# EAGLE board Hexagonal_MCU (EAGLE 8.7.1)
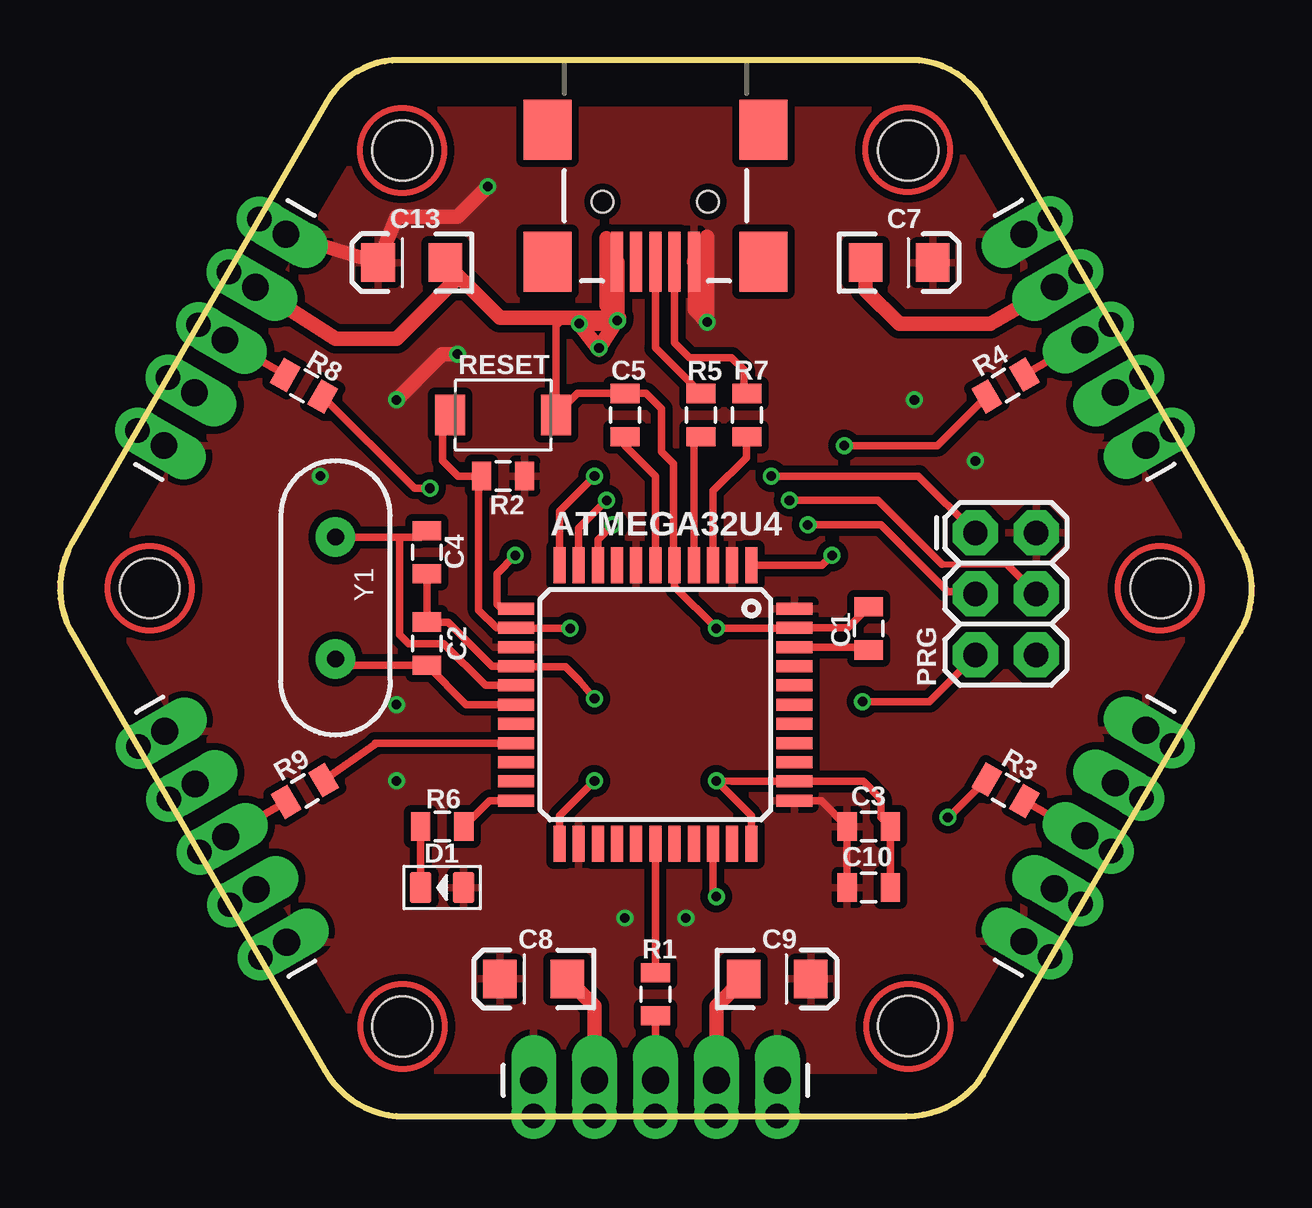
[diagram p0: board, top side]
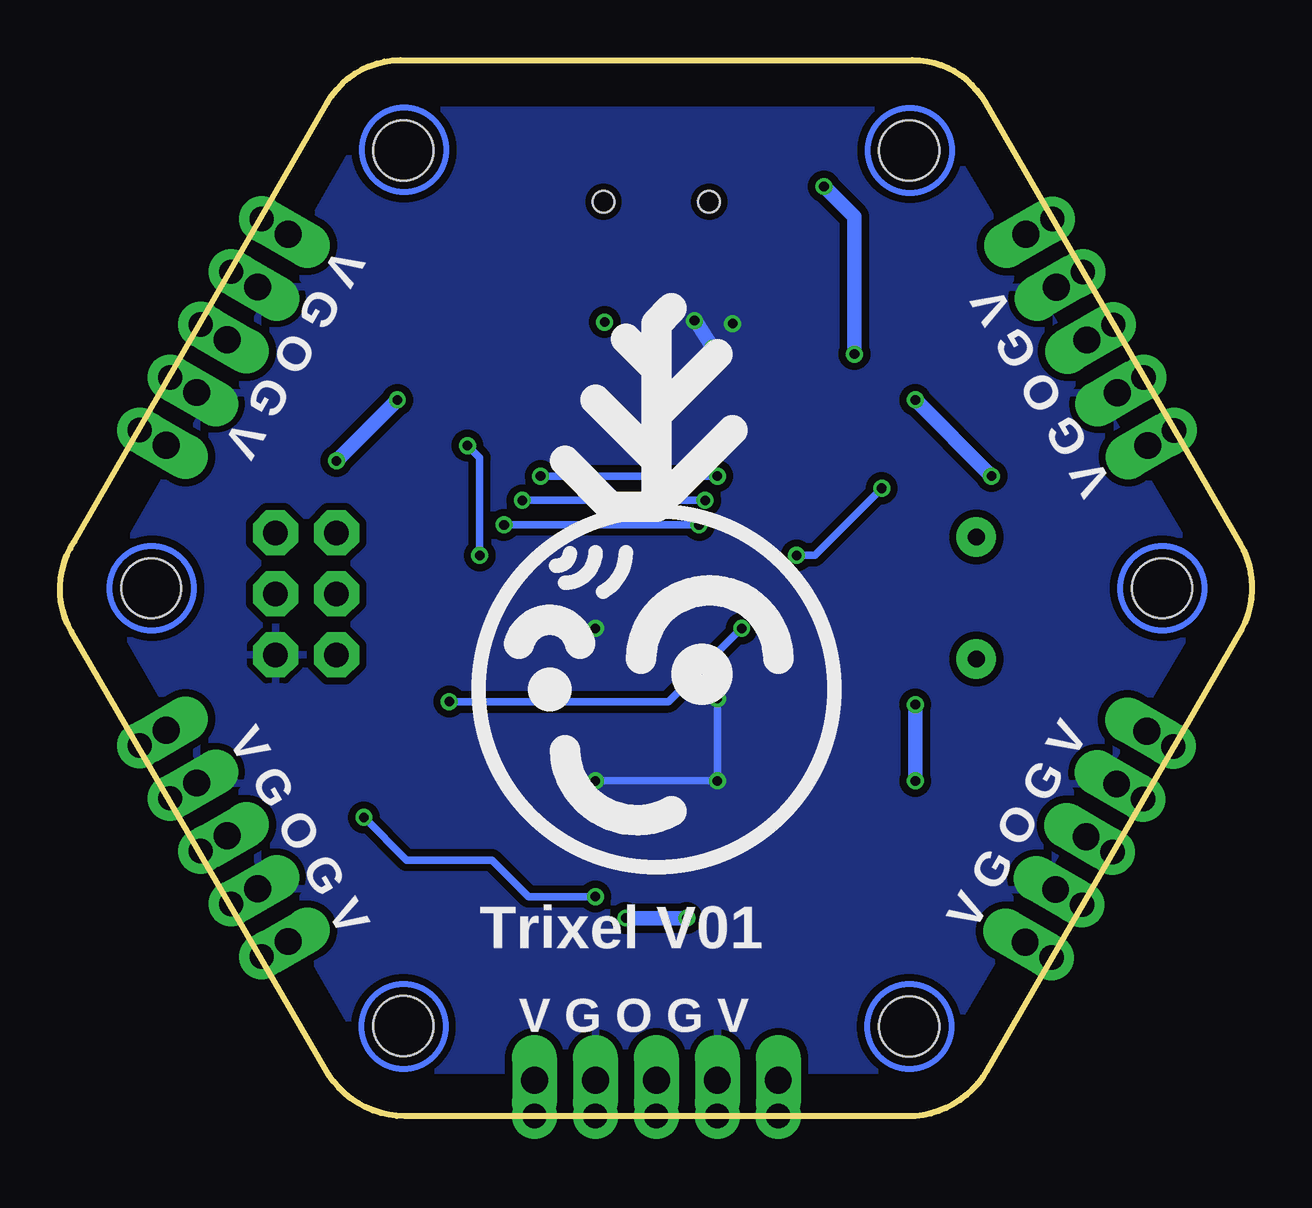
[diagram p1: board, bottom side, seen from below]

Size 49.68 x 44.01 mm. Coordinates in mm from the lower left corner, seen from the top.
Outline: 14.02,0 35.3,0 arc57 38.47,1.71 49.2,20.19 arc64 49.08,23.94 38.54,42.23 arc60 35.49,44.01 14.15,44.01 arc61 11.1,42.23 0.5,23.88 arc58 0.44,20.26 11.04,1.91 arc55 14.02,0
Copper layers (1*16): Top 0.035mm / dielectric 1.5mm / Bottom 0.035mm
Design rules "SeeedStudio_2layer_DRU_no_angle_20140221 *": minimum track width 6mil, minimum drill 12mil, track to track 6mil, track to pad 6mil, pad to pad 6mil, via to via 6mil, smd to smd 0mil, copper to edge 10mil, drill to drill 10mil, minimum pad ring 10mil, minimum via ring 6mil, stop-mask expansion 2mil, vias tented up to drill 20mil, thermal gap 10mil
Net classes: 0 default: width 0.203 mm
Holes 2.5 mm at 35.36,3.76 14.28,3.73 45.88,22 35.36,40.23 14.28,40.23 3.74,22
tRestrict: area 8.6,9.6 to 8.8,9.7

## Footprints (pad centres in the part's own frame; a part is rotated, then mirrored left to right if it is on the bottom)
TQFP44 = smd 1.5 x 0.5: 1 -5.8,4; 2 -5.8,3.2; 3 -5.8,2.4; 4 -5.8,1.6; 5 -5.8,0.8; 6 -5.8,0; 7 -5.8,-0.8; 8 -5.8,-1.6; 9 -5.8,-2.4; 10 -5.8,-3.2; 11 -5.8,-4; 23 5.8,-4; 24 5.8,-3.2; 25 5.8,-2.4; 26 5.8,-1.6; 27 5.8,-0.8; 28 5.8,0; 29 5.8,0.8; 30 5.8,1.6; 31 5.8,2.4; 32 5.8,3.2; 33 5.8,4 | smd 0.5 x 1.5: 12 -4,-5.8; 13 -3.2,-5.8; 14 -2.4,-5.8; 15 -1.6,-5.8; 16 -0.8,-5.8; 17 0,-5.8; 18 0.8,-5.8; 19 1.6,-5.8; 20 2.4,-5.8; 21 3.2,-5.8; 22 4,-5.8; 34 4,5.8; 35 3.2,5.8; 36 2.4,5.8; 37 1.6,5.8; 38 0.8,5.8; 39 0,5.8; 40 -0.8,5.8; 41 -1.6,5.8; 42 -2.4,5.8; 43 -3.2,5.8; 44 -4,5.8
0805 = smd 0.8 x 1.2: 1 -0.9,0; 2 0.9,0
EIA3216 = smd 1.4 x 1.6: A 1.4,0; C -1.4,0
LED-0805 = smd 0.889 x 1.27: + -0.889,0; - 0.889,0
1X05_NO_SILK = drill 1.016 pad 1.88: 1 0,0; 2 2.54,0; 3 5.08,0; 4 7.62,0; 5 10.16,0
USB-MINIB = smd 2.5 x 0.5: D+ 2.5,0; D- 2.5,0.8; GND 2.5,-1.6; ID 2.5,-0.8; VBUS 2.5,1.6 | smd 2.5 x 2: MTN1 -3,4.5; MTN2 2.5,4.5; MTN3 -3,-4.5; MTN4 2.5,-4.5 | hole 0.9: 0,2.2; 0,-2.2
1X05_LONGPADS = drill 1.118 pad 1.88 long: 1 0,0; 2 2.54,0; 3 5.08,0; 4 7.62,0; 5 10.16,0
2X3 = drill 1.016 pad 1.88 octagon: 1 0,0; 2 0,2.54; 3 2.54,0; 4 2.54,2.54; 5 5.08,0; 6 5.08,2.54
SW2-4.0X3.0X2.0 = smd 1.25 x 1.7: 1 -2.2,0; 2 2.2,0
HC49US = drill 0.7 pad 1.651: 1 -2.54,0; 2 2.54,0

## Placement (x,y rotation side)
ATMEGA32U4  ATMEGA32U4TQFP-44  [TQFP44]  24.82,17.14 270 top
C1  0.1uF  [0805]  33.71,20.32 270 top
C2  22pF  [0805]  15.29,19.68 90 top
C3  0.1uF  [0805]  33.71,12.06 180 top
C4  22pF  [0805]  15.29,23.5 270 top
C5  1uF  [0805]  23.55,29.21 270 top
C7  10uF  [EIA3216]  34.98,35.56 0 top
C8  10uF  [EIA3216]  19.74,5.71 180 top
C9  10uF  [EIA3216]  29.9,5.71 0 top
C10  1uF  [0805]  33.71,9.53 0 top
C13  10uF  [EIA3216]  14.66,35.56 180 top
D1  GREEN-0805  [LED-0805]  15.93,9.53 180 top
J1  [1X05_NO_SILK]  29.9,0 180 top
J2  [1X05_NO_SILK]  41.27,6.64 60 top
J3  USB-MINIB-5PIN  [USB-MINIB]  24.82,38.1 270 top
J4  [1X05_LONGPADS]  29.9,1.5 180 top
J5  [1X05_LONGPADS]  40.17,7.28 60 top
J6  [1X05_NO_SILK]  46.35,28.58 120 top
J7  [1X05_LONGPADS]  45.25,27.95 120 top
J8  [1X05_NO_SILK]  8.31,37.37 240 top
J9  [1X05_LONGPADS]  9.41,36.74 240 top
J10  [1X05_NO_SILK]  3.27,15.41 300 top
J11  [1X05_LONGPADS]  4.37,16.04 300 top
PRG  AVR_SPI_PRG_6PTH  [2X3]  38.15,24.3 270 top
R1  1k  [0805]  24.82,5.08 270 top
R2  10K  [0805]  18.47,26.67 0 top
R3  1k  [0805]  39.41,13.58 330 top
R4  1k  [0805]  39.41,30.44 30 top
R5  22  [0805]  26.72,29.21 90 top
R6  1k  [0805]  15.93,12.06 180 top
R7  22  [0805]  28.63,29.21 90 top
R8  1k  [0805]  10.17,30.43 150 top
R9  1k  [0805]  10.21,13.55 210 top
RESET  B3U-1000P-2P-SMD  [SW2-4.0X3.0X2.0]  18.47,29.21 180 top
Y1  16MHz  [HC49US]  11.48,21.59 270 top

## Library data of the parts
ATMEGA32U4 = SparkFun-DigitalIC
C1-C5 C7-C10 C13 R1-R9 Y1 = SparkFun
D1 = Seeed-LED-2016; MPN: 17-215SYGC/S530-E2/TR8
J1 J2 J4-J11 PRG = SparkFun-Connectors
J3 = SparkFun-Connectors; PROD_ID: CONN-08193
RESET = SMD_Button_Custom; MPN: B3U-1000P-2P-SMD

## Nets
5V [vcc]: ATMEGA32U4.2 ATMEGA32U4.7 ATMEGA32U4.14 ATMEGA32U4.24 ATMEGA32U4.34 ATMEGA32U4.44 C3.2 C7.A C8.A C9.A C10.1 C13.A D1.+ J1.1 J1.5 J2.1 J2.5 J3.VBUS J4.1 J4.5 J5.1 J5.5 J6.1 J6.5 J7.1 J7.5 J8.1 J8.5 J9.1 J9.5 J10.1 J10.5 J11.1 J11.5 PRG.2 R2.2
A0: ATMEGA32U4.36
A1: ATMEGA32U4.37
A2: ATMEGA32U4.38
A3: ATMEGA32U4.39
A4: ATMEGA32U4.40
A5: ATMEGA32U4.41
AREF: ATMEGA32U4.42 C1.2
D2_SDA: ATMEGA32U4.19 R9.1
D3_SCL: ATMEGA32U4.18
D4: ATMEGA32U4.25
D5: ATMEGA32U4.31 R3.1
D6: ATMEGA32U4.27
D7: ATMEGA32U4.1 R4.1
D8: ATMEGA32U4.28 R1.1
D9: ATMEGA32U4.29
D10: ATMEGA32U4.30
D11: ATMEGA32U4.12 R8.1
D12: ATMEGA32U4.26
D13: ATMEGA32U4.32
D14: ATMEGA32U4.8
D+: ATMEGA32U4.4 R5.1
D-: ATMEGA32U4.3 R7.1
GND: ATMEGA32U4.5 ATMEGA32U4.15 ATMEGA32U4.23 ATMEGA32U4.33 ATMEGA32U4.35 ATMEGA32U4.43 C1.1 C2.2 C3.1 C4.2 C5.1 C7.C C8.C C9.C C10.2 C13.C J1.2 J1.4 J2.2 J2.4 J3.GND J4.2 J4.4 J5.2 J5.4 J6.2 J6.4 J7.2 J7.4 J8.2 J8.4 J9.2 J9.4 J10.2 J10.4 J11.2 J11.4 PRG.6 RESET.1
MISO: ATMEGA32U4.11 PRG.1
MOSI: ATMEGA32U4.10 PRG.4
N$1: ATMEGA32U4.16 C4.1 Y1.1
N$2: ATMEGA32U4.17 C2.1 Y1.2
N$4: J2.3 J5.3 R3.2
N$5: J1.3 J4.3 R1.2
N$6: J3.D- R7.2
N$7: D1.- R6.2
N$8: J3.D+ R5.2
N$9: J6.3 J7.3 R4.2
N$10: J8.3 J9.3 R8.2
N$11: J10.3 J11.3 R9.2
RESET: ATMEGA32U4.13 PRG.5 R2.1 RESET.2
RXI: ATMEGA32U4.20
SCK: ATMEGA32U4.9 PRG.3
TXLED: ATMEGA32U4.22 R6.1
TXO: ATMEGA32U4.21
UCAP: ATMEGA32U4.6 C5.2

## Tracks (layer width: path | path; a pad name or v marks a point on that pad's centre or on a via)
5V  (via drill 0.4)
  Top 0.305: ATMEGA32U4.34 31.73,13.14 C3.2 C10.1 | J1.5 J4.5 | J1.1 J4.1 | J2.1 J5.1 | J2.5 J5.5 | J7.1 J6.1 | J6.5 J7.5 | J8.1 J9.1 | J9.5 J8.5 | J11.1 J10.1 | J11.5 J10.5
  Top 0.61: J3.VBUS 26.47,35.55 26.47,33.59 v26.98,33.08 26.98,36.64 | J9.1 C13.A 14.02,37.47 16.56,37.47 v17.83,38.73 | v14.02,29.84 15.93,31.75 v16.56,31.75
  Bottom 0.61: v23.55,8.26 v26.09,8.26 | v14.02,13.97 v14.02,17.14 | v10.85,26.67 v14.02,29.84 | v35.61,29.84 v38.15,27.3 | v16.56,31.75 16.56,37.47 v17.83,38.73
  pour Top (isolate 0.305): 14.66,1.91 34.98,1.91 37.52,3.81 47.04,20.32 47.04,23.5 36.88,41.27 34.98,41.91 14.02,41.91 12.75,40.64 2.59,23.5 2.59,20.32 12.75,3.17
AREF
  Top 0.305: ATMEGA32U4.42 33.58,19.55 C1.2
D2_SDA
  Top 0.305: ATMEGA32U4.19 13.14,15.54 13.14,15.49 R9.1
D5  (via drill 0.4)
  Top 0.305: ATMEGA32U4.31 27.22,9.28 v27.36,9.14 | v37.01,12.45 37.05,12.45 R3.1
  Bottom 0.305: v27.36,9.14 30.15,9.14 31.68,10.67 35.23,10.67 v37.01,12.45
D7  (via drill 0.4)
  Top 0.305: ATMEGA32U4.1 31.76,22.95 v32.19,23.37 | v32.69,27.94 36.58,27.94 R4.1
  Bottom 0.305: v32.19,23.37 32.19,27.43 v32.69,27.94
D8
  Top 0.305: R1.1 ATMEGA32U4.28
D11  (via drill 0.4)
  Top 0.305: ATMEGA32U4.12 18.41,21.14 18.22,21.34 18.22,22.61 v18.98,23.37 | v15.42,26.16 14.78,26.16 R8.1
  Bottom 0.305: v18.98,23.37 18.22,23.37 v15.42,26.16
D+
  Top 0.305: ATMEGA32U4.4 26.42,28 R5.1
D-
  Top 0.305: ATMEGA32U4.3 27.22,26.05 28.6,27.43 28.6,28.29 R7.1
GND  (via drill 0.4)
  Top 0.305: C4.2 C2.2 16.18,20.57 18.01,18.75 ATMEGA32U4.15 19.03,18.73 21.07,18.73 21.64,18.16 v22.28,17.4 | C1.1 32.83,20.34 ATMEGA32U4.43 30.59,20.32 v27.36,20.32 25.62,22.06 ATMEGA32U4.5 25.58,22.98 25.58,27.18 25.07,27.69 25.07,29.46 24.43,30.11 C5.1 21.57,30.11 RESET.1 20.67,32.93 21.01,33.27 | C10.2 C3.1 34.22,12.46 34.22,13.21 33.48,13.95 ATMEGA32U4.35 28.02,13.95 v27.36,13.97 28.82,12.51 ATMEGA32U4.33 | ATMEGA32U4.23 20.82,12.51 v22.28,13.97 | J1.4 J4.4 | J1.2 J4.2 | J2.2 J5.2 | J2.4 J5.4 | J6.2 J7.2 | J6.4 J7.4 | J8.2 8.31,34.29 J9.2 | J9.4 J8.4 | J10.2 J11.2 | J11.4 J10.4
  Top 0.61: 23.23,33.21 23.23,35.59 J3.GND 22.79,36.03 | 23.23,33.21 v23.23,33.15 | 22.79,36.03 22.79,36.58 | 22.79,36.03 22.79,33.78 23.3,33.27 21.01,33.27 18.35,33.27 C13.C | J4.2 27.36,4.58 C9.C | J4.4 22.28,4.58 C8.C | C7.C 33.58,34.42 34.98,33.02 38.79,33.02 J7.4 | J9.2 11.48,32.38 14.02,32.38 16.56,34.92 15.93,35.56 | v22.47,32 22.47,31.94 v21.64,33.02 | 23.23,33.21 v22.47,32 | v22.47,32 v21.64,33.02 | v21.64,33.02 22.91,33.02
  Bottom 0.305: v27.36,13.97 v22.28,13.97 v22.28,17.4
  Bottom 0.61: v23.23,33.15 23.11,33.02 v22.47,32
  pour Bottom (isolate 0.305): 14.66,1.91 34.98,1.91 37.52,3.81 47.04,20.32 47.04,23.5 36.88,41.27 34.98,41.91 14.02,41.91 12.75,40.64 2.59,23.5 2.59,20.32 12.75,3.17
MISO  (via drill 0.4)
  Top 0.305: ATMEGA32U4.11 20.82,25.21 v22.28,26.67 | v29.65,26.67 35.78,26.67 PRG.1
  Bottom 0.305: v22.28,26.67 v29.65,26.67
MOSI  (via drill 0.4)
  Top 0.254: 36.76,22.99 39.47,22.99
  Top 0.305: ATMEGA32U4.10 21.62,24.49 v22.79,25.65 | v30.41,25.65 34.09,25.65 36.76,22.99 | 39.47,22.99 PRG.4
  Bottom 0.305: v22.79,25.65 v30.41,25.65
N$1
  Top 0.305: Y1.1 14.15,24.13 | 14.15,24.13 15.03,24.13 C4.1 | ATMEGA32U4.16 17.73,17.95 15.99,19.68 14.53,19.68 14.15,20.07 14.15,24.13
N$2
  Top 0.305: Y1.2 11.75,18.79 C2.1 16.93,17.14 ATMEGA32U4.17
N$4
  Top 0.305: R3.2 J5.3 J2.3
N$5
  Top 0.305: R1.2 J4.3 J1.3
N$6
  Top 0.305: J3.D- 25.62,32.22 26.24,31.6 27.99,31.6 28.5,31.09 28.5,30.24 R7.2
N$7
  Top 0.305: R6.2 D1.-
N$8
  Top 0.305: J3.D+ 24.82,32.02 R5.2
N$9
  Top 0.305: R4.2 J7.3 J6.3
N$10
  Top 0.305: R8.2 J9.3 J8.3
N$11
  Top 0.305: R9.2 J11.3 J10.3
RESET  (via drill 0.4)
  Top 0.305: RESET.2 15.95,28.89 15.95,27.3 16.59,26.67 R2.1 17.45,26.55 17.45,21.08 18.19,20.34 ATMEGA32U4.13 19.04,20.32 v21.26,20.32 | PRG.5 38.15,19.18 36.25,17.27 v33.46,17.27
  Bottom 0.305: v33.46,17.27 24.31,17.27 v21.26,20.32
SCK  (via drill 0.4)
  Top 0.305: ATMEGA32U4.9 22.42,24.02 v23.04,24.64 | v31.17,24.64 34.22,24.64 37.01,21.84 38.07,21.84 PRG.3
  Bottom 0.305: v23.04,24.64 v31.17,24.64
TXLED
  Top 0.305: ATMEGA32U4.22 17.91,13.14 R6.1
UCAP
  Top 0.305: C5.2 23.55,27.94 24.82,26.67 ATMEGA32U4.6
(copper drawn outside any net)
  shapes: Bottom circle x6, Top circle x6

## Text on the board
bPlace: V G O G V | V G O G V | V G O G V | V G O G V | Trixel V01 | V G O G V